# Altium PCB PCB.PcbDoc
Units mm, origin at the board's own origin, x right, y up, seen from the top; angles counter-clockwise.
Board outline 31.62 x 37.97 mm, 2 copper layers (Top Layer, Bottom Layer); 11 components, 10 nets, 30 pads, 1 vias.
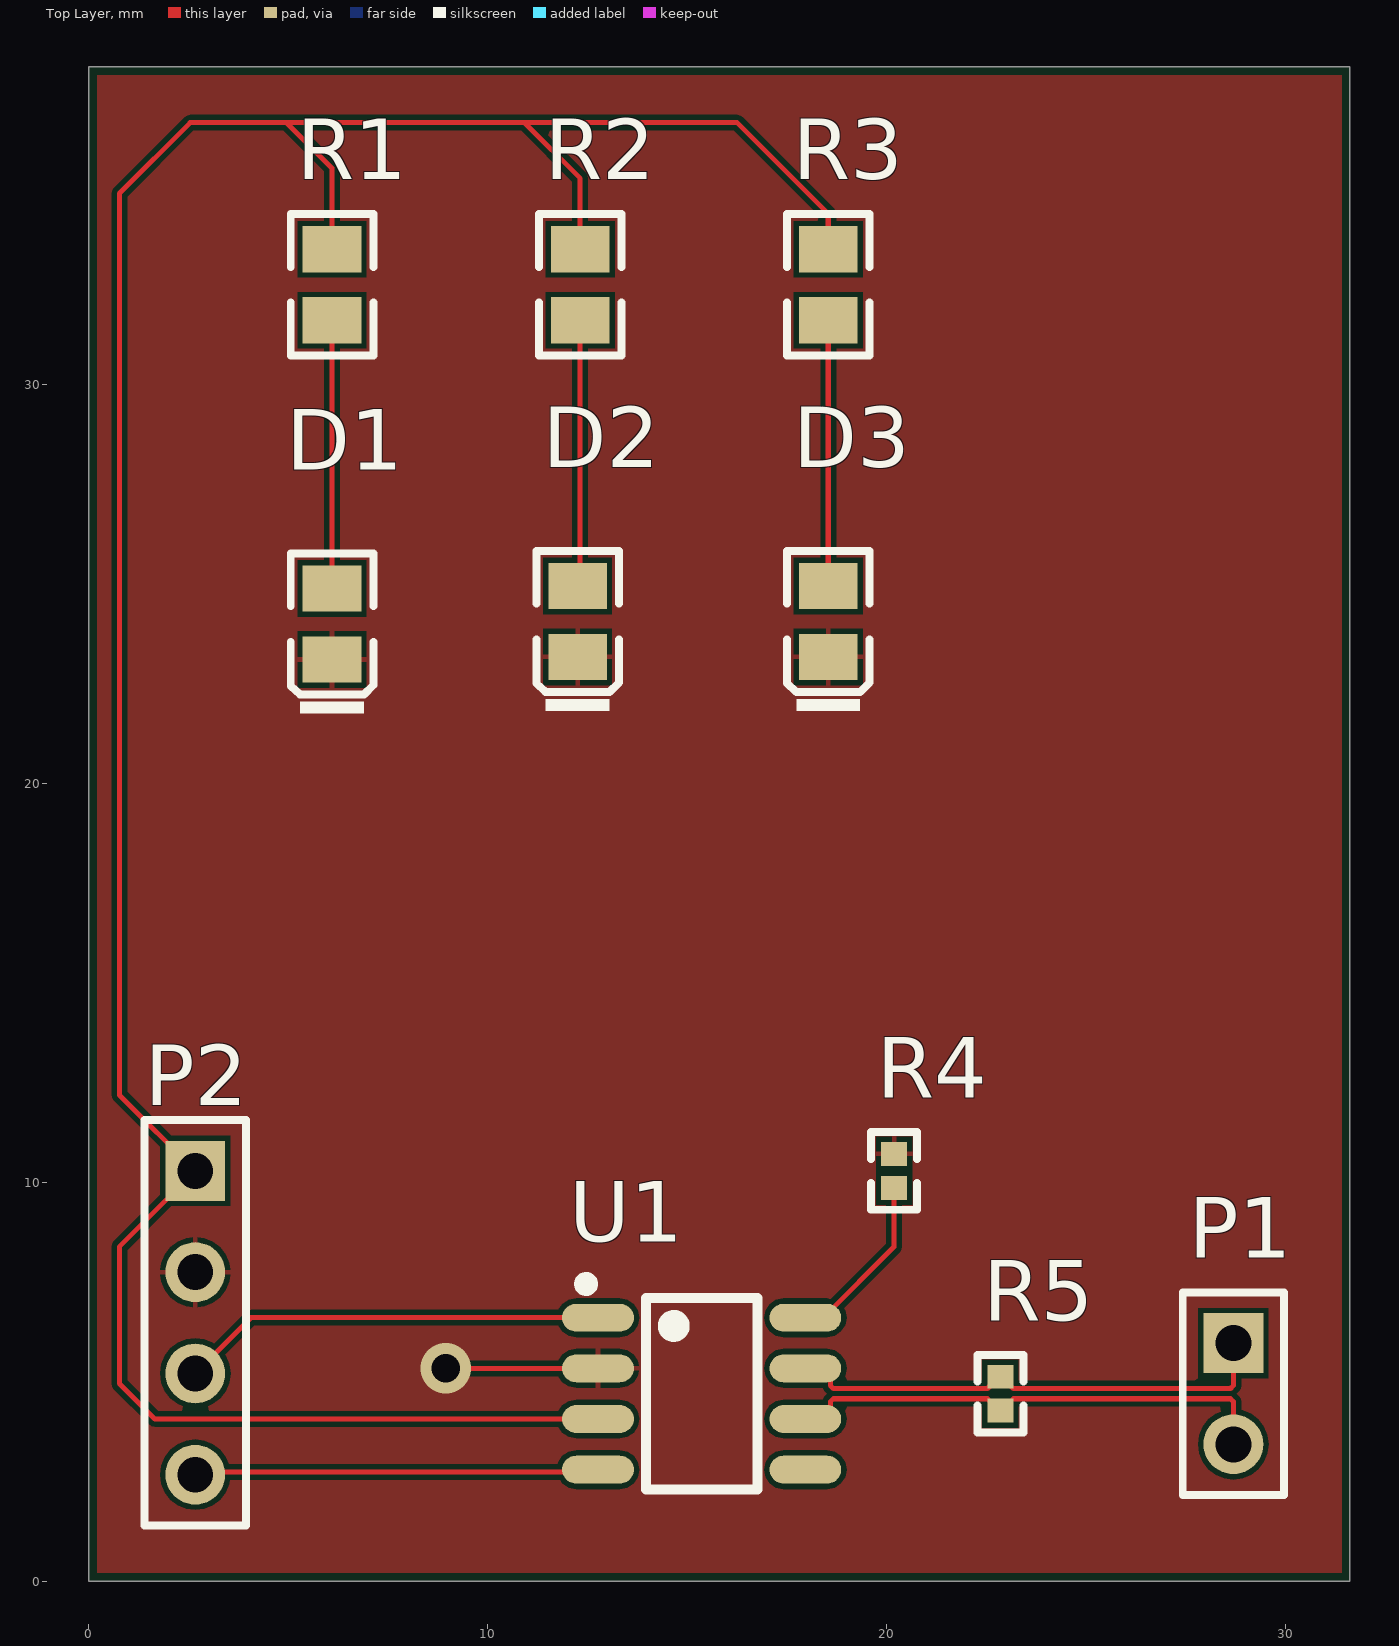
[diagram p0: Top Layer view]
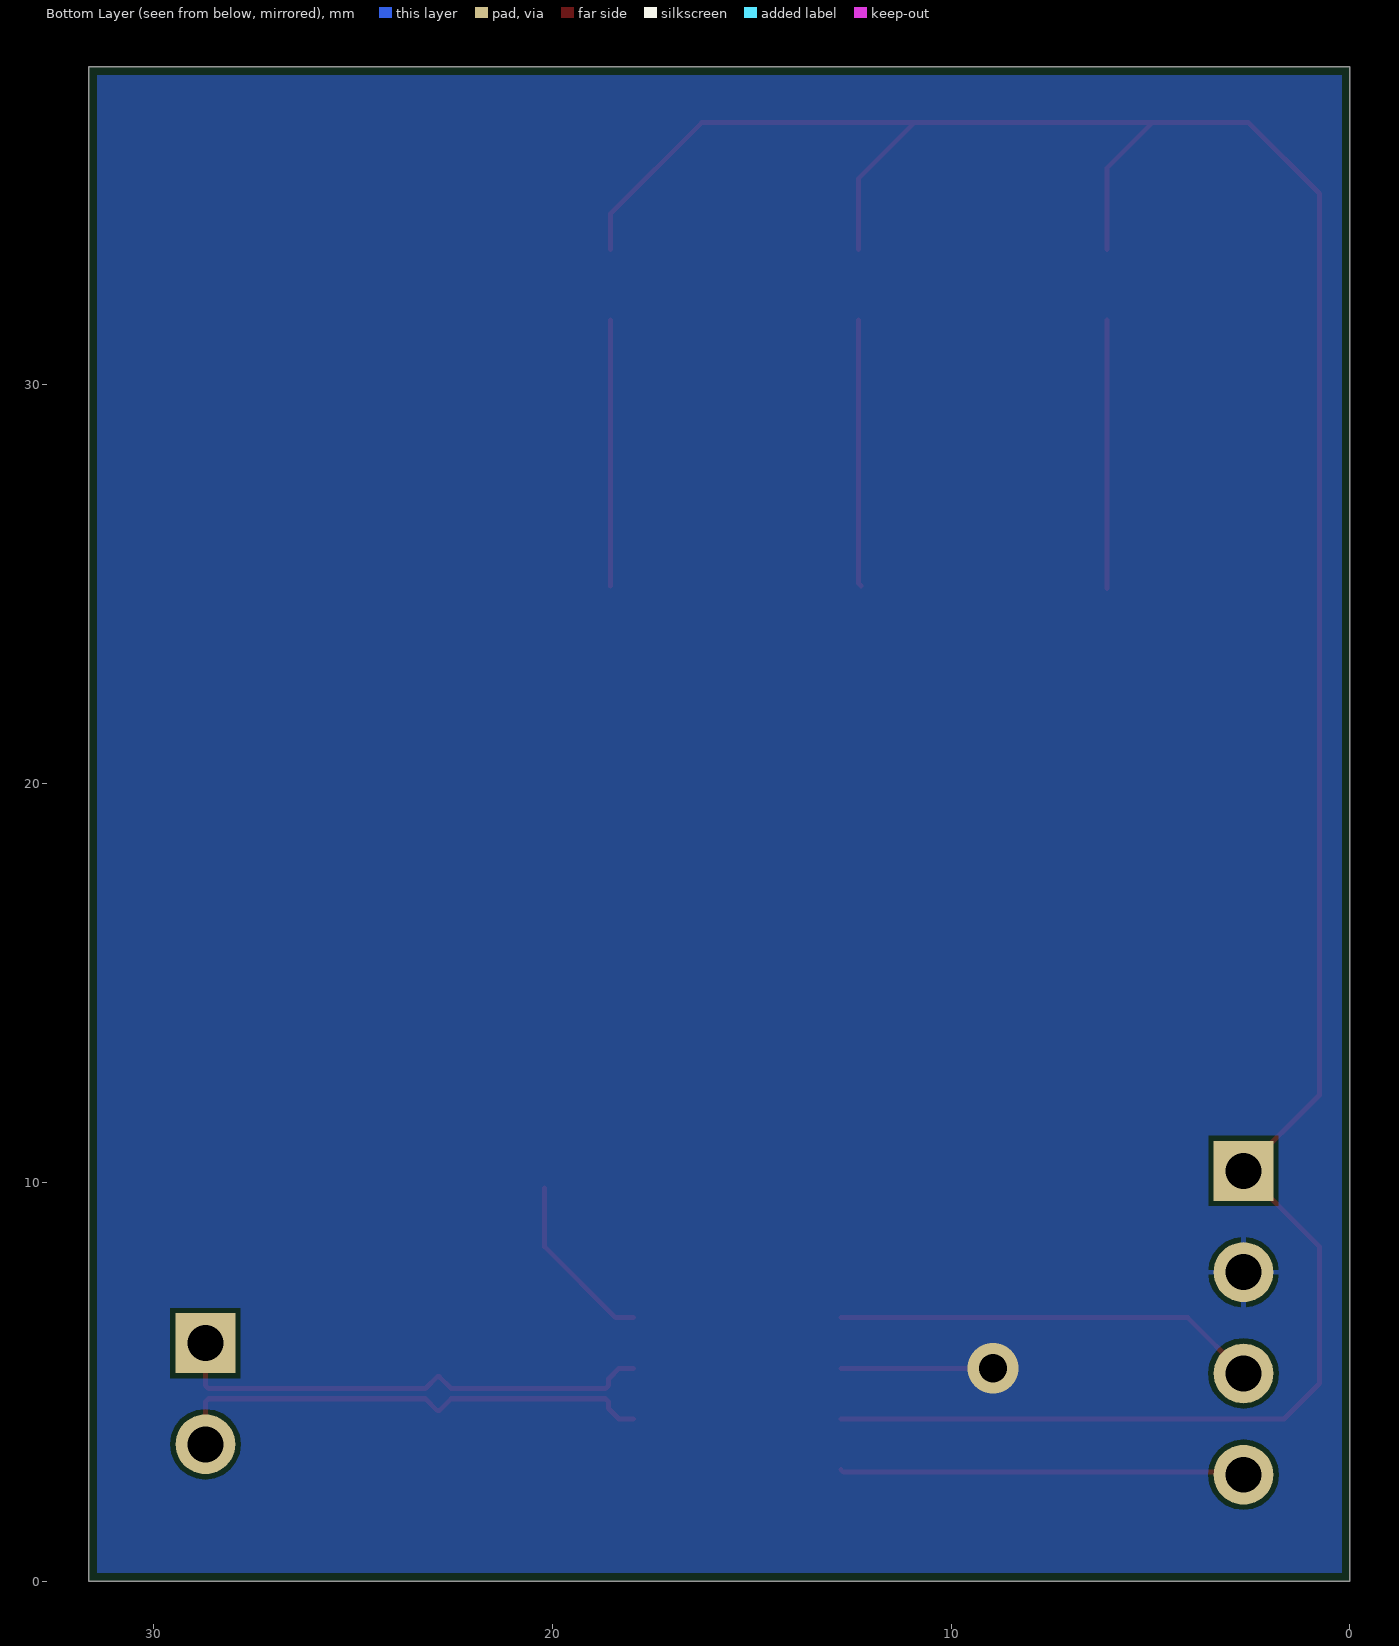
[diagram p1: Bottom Layer view, seen from below]
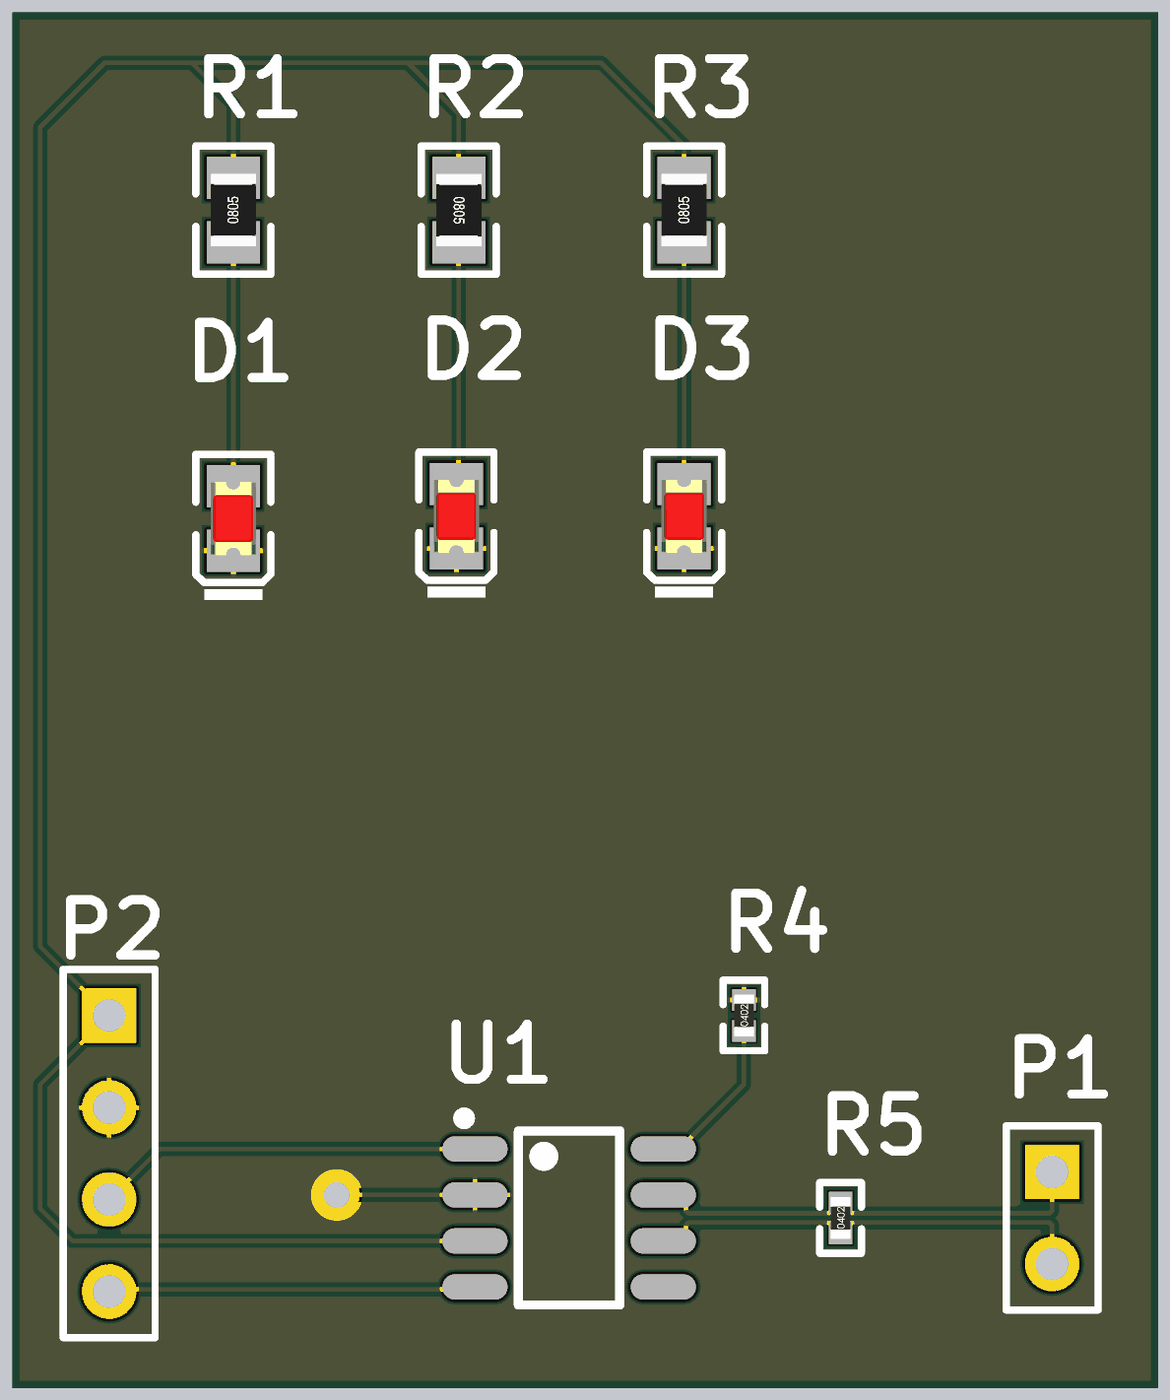
[diagram p2: 3D render of the assembled board from above, using the file's embedded part models]

## Layer stack, top to bottom
Top Solder: solder mask 0.0102, Solder Resist, Dk 3.5
Top Layer: signal copper 0.0356
Dielectric 1: dielectric 0.32, FR-4, Dk 4.8
Bottom Layer: signal copper 0.0356
Bottom Solder: solder mask 0.0102, Solder Resist, Dk 3.5

## Board outline
0,0 31.623,0 31.623,37.973 0,37.973

## Design rules (kind name [scope] priority, off if disabled: settings)
BoardOutlineClearance [All] p1: gap=0.2 ignorepadtopadclearanceinfootprint=FALSE
Clearance [All] p1: gap=0.127 ignorepadtopadclearanceinfootprint=FALSE except(0.25: Arc-Hole Track-Hole SMDPad-Hole THPad-Hole Via-Hole Fill-Hole Poly-Hole Region-Hole Text-Hole)
ComponentClearance [All] p1: gap=0.127 collisioncheckmode=3 verticalgap=0.127 showdistances=TRUE
DiffPairsRouting [All] p1: maxlimit=0.254 minlimit=0.127 mostfreqgap=0.127 toplayer_minwidth=0.127 toplayer_maxwidth=25.4 toplayer_prefwidth=0.127 bottomlayer_minwidth=0.127 bottomlayer_maxwidth=25.4 bottomlayer_prefwidth=0.127 maxuncoupledlength=12.7
Height [All] p1: minheight=0 maxheight=1816.048 prefheight=12.7
HoleSize [All] p1: absolutevalues=TRUE maxlimit=6.3 minlimit=0.3 maxpercent=80.000 minpercent=20.000
HoleToHoleClearance [All] p1: gap=0.25 allowstackedmicrovias=FALSE
MinimumAnnularRing [All] p1: minimumring=0.076
MinimumSolderMaskSliver [All] p1: minsoldermaskwidth=0
PlaneClearance [All] p1: clearance=0.127
PlaneConnect PlaneConnectPowerPads [InPadClass('PowerPads')] p1: planeconnectstyle=Direct reliefexpansion=0.508 reliefentries=4 reliefconductorwidth=0.254 reliefairgap=0.254
PlaneConnect [All] p2: pad.planeconnectstyle=Relief pad.reliefexpansion=0.3 pad.reliefentries=4 pad.reliefconductorwidth=0.127 pad.reliefairgap=0.127 via.planeconnectstyle=Direct via.reliefexpansion=0.3 via.reliefentries=4 via.reliefconductorwidth=0.127 via.reliefairgap=0.127
PolygonConnect PolygonConnectPowerPads [All vs (InPadClass('PowerPads'))] p1: connectstyle=Direct reliefconductorwidth=0.254 reliefentries=4 polygonreliefangle="90 Angle" airgapwidth=0.254
PolygonConnect [All] p2: thpad.connectstyle=Relief thpad.reliefconductorwidth=0.127 thpad.reliefentries=4 thpad.polygonreliefangle="90 Angle" thpad.airgapwidth=0.127 smdpad.connectstyle=Relief smdpad.reliefconductorwidth=0.127 smdpad.reliefentries=4 smdpad.polygonreliefangle="90 Angle" smdpad.airgapwidth=0.127 via.connectstyle=Direct via.reliefconductorwidth=0.127 via.reliefentries=4 via.polygonreliefangle="90 Angle" via.airgapwidth=0.127
RoutingVias [All] p1: holewidth=0.3 width=0.6 viastyle="Through Hole" minholewidth=0.3 minwidth=0.6 maxholewidth=0.6 maxwidth=6.6
SilkToSilkClearance [All] p1: silktosilkclearance=0
SilkToSolderMaskClearance [IsPad] p1: minsilkscreentomaskgap=0.127 clearancetoexposedcopper=TRUE
SolderMaskExpansion [All] p1: expansion=0.075 istentingtop=FALSE
Width [All] p1: maxlimit=25.4 minlimit=0.127 preferedwidth=0.127 minimp=50.000000 maximp=50.000000 favimp=50.000000
20 further rules are at their usual default settings.

## Classes and differential pairs
differential pair CAN: +CAN_P -CAN_N

## Components (designator, comment, footprint, x,y, rotation, side; value= is the part's Value field where it differs from the comment)
D1 "0805 Red" 0805_LED_S1 6.096,24.002 r90 top
D2 "0805 Red" 0805_LED_S1 12.255,24.066 r90 top
D3 "0805 Red" 0805_LED_S1 18.542,24.066 r90 top
P1 "Header 2" HDR1X2 28.702,5.969 r270 top
P2 "Header 4" HDR1X4 2.667,10.287 r270 top
R1 "1KΩ ±1%" 0805_R 6.096,32.512 r90 top
R2 "1KΩ ±1%" 0805_R 12.319,32.512 r270 top
R3 "1KΩ ±1%" 0805_R 18.542,32.512 r90 top
R4 "10KΩ ±1%" 0402_R 20.193,10.287 r90 top
R5 "120Ω ±1%" 0402_R 22.86,4.699 r90 top
U1 "CAN/SN65HVD230DR" SOIC-8_150mil 15.367,4.699 r270 top

## Footprints (in the part's own frame and the unit in brackets; to place one, negate y for a bottom-side part, rotate by r counter-clockwise, add the part's x,y. Pads: shape width x height; smd on the part's side, far side on the other; paste and mask are expansions set on the pad)
0402_R [mm]
  rect 0.6x0.65 smd mask+0.051: 1(-0.425,0) 2(0.425,0)
  silkscreen extent -0.97,-0.58 0.97,0.58, body extent -0.57,-0.27 0.58,0.28, height 0.41
0805_LED_S1 [mm]
  rect 1.16x1.47 smd: A(0.89,0) K(-0.89,0)
  silkscreen extent -2.24,-1.04 1.77,1.03, body extent -1.01,-0.63 1.01,0.62, height 1.1
0805_R [mm]
  rect 1.16x1.47 smd: 1(-0.89,0) 2(0.89,0)
  silkscreen extent -1.77,-1.04 1.77,1.03, body extent -1,-0.62 1,0.63, height 0.49
HDR1X2 [mm] "Connector; Header; 2 Position"
  rect 1.5x1.5 hole 0.9: 1(0,0)
  round 1.5 hole 0.9: 2(2.54,0)
  silkscreen extent -1.27,-1.27 3.81,1.27
HDR1X4 [mm] "Connector; Header; 4 Position"
  rect 1.5x1.5 hole 0.9: 1(0,0)
  round 1.5 hole 0.9: 2(2.54,0) 3(5.08,0) 4(7.62,0)
  silkscreen extent -1.27,-1.27 8.89,1.27
SOIC-8_150mil [mm]
  oval 0.7x1.8 smd: 1(-1.905,-2.6) 2(-0.635,-2.6) 3(0.635,-2.6) 4(1.905,-2.6) 5(1.905,2.6) 6(0.635,2.6) 7(-0.635,2.6) 8(-1.905,2.6)
  silkscreen extent -2.9,-3.05 2.4,1.4

## Part data
D1 D2 D3: library part "0805 LED Red", "LED", Color=Red, Manufacturer="Foshan NationStar Optoelectronics", Package=0805, PartNumber=FC-2012HRK-620D, SuppliersPartNumber=C84256, ComponentLink1Description=供应商链接, ComponentLink1URL=http://www.szlcsc.com/product/details_2668.html, Supplier=LC
P1: "Header, 2-Pin", LatestRevisionDate=17-Jul-2002, LatestRevisionNote="Re-released for DXP Platform.", Publisher="Altium Limited"
P2: "Header, 4-Pin", LatestRevisionDate=17-Jul-2002, LatestRevisionNote="Re-released for DXP Platform.", Publisher="Altium Limited"
R1 R2 R3: library part "0805 1K (1001) 1%", "Chip resistor", Manufacturer="Uniroyal Elec", Package=0805, PartNumber=0805W8F1001T5E, Power=1/8W, Resistance=1KΩ, SuppliersPartNumber=C17513, Tolerance=1%, ComponentLink1Description="Supplier link", ComponentLink1URL=http://www.szlcsc.com/product/details_18201.html, Supplier=LC
R4: library part "0402 10K (1002) 1%", "Chip resistor", Manufacturer="Uniroyal Elec", Package=0402, PartNumber=0402WGF1002TCE, Power=1/16W, Resistance=10KΩ, SuppliersPartNumber=C25744, Tolerance=1%, ComponentLink1Description="Supplier link", ComponentLink1URL=http://www.szlcsc.com/product/details_26487.html, Supplier=LC
R5: library part "0402 120R (1200) 1%", "Chip resistor", Manufacturer="Uniroyal Elec", Package=0402, PartNumber=0402WGF1200TCE, Power=1/16W, Resistance=120Ω, SuppliersPartNumber=C25079, Tolerance=1%, ComponentLink1Description="Supplier link", ComponentLink1URL=http://www.szlcsc.com/product/details_25822.html, Supplier=LC
U1: library part CAN/SN65HVD230DR_[C12084], "CAN", Package=SOIC-8_150mil, SuppliersPartNumber=C12084, ComponentLink1Description=供应商链接, ComponentLink1URL=http://www.szlcsc.com/product/details_12661.html, Supplier=LC

## Via types
v1: diameter 1.27, hole 0.711, Top Layer to Bottom Layer, 1 vias

## Nets (pads, with @x,y where several pads share a name; then routed paths per layer and width w, separated by ;. In a path a pad name is that pad's centre, name@x,y a point inside that pad or via, vN(x,y) a via of type N, cw(c..) or ccw(c..) an arc to the next point about the centre after c; other vN are vias at no path point)
CAN_N: P1.2 R5.1 U1.6 | length 12.4
  Top Layer w0.127: U1.6 18.329,4.064 18.594,4.329 18.594,4.498 18.668,4.572 22.034,4.572 22.537,4.572 22.835,4.274 R5.1 22.885,4.274 23.183,4.572 27.432,4.572 28.628,4.572 28.702,4.498 P1.2
CAN_P: P1.1 R5.2 U1.7 | length 12.4
  Top Layer w0.127: U1.7 18.329,5.334 18.594,5.069 18.594,4.9 18.668,4.826 21.929,4.826 22.537,4.826 22.835,5.124 R5.2 22.885,5.124 23.183,4.826 27.537,4.826 28.628,4.826 28.702,4.9 P1.1
GND: D1.K D2.K D3.K P2.2 R4.2 U1.2 | length 3.8
  Top Layer w0.127: v1(8.95,5.334) U1.2
NetD1_A: D1.A R1.1 | length 6.7
  Top Layer w0.127: D1.A R1.1
NetD2_A: D2.A R2.2 | length 6.7
  Top Layer w0.127: D2.A 12.319,25.02 R2.2
NetD3_A: D3.A R3.1 | length 6.7
  Top Layer w0.127: D3.A R3.1
NetR4_1: R4.1 U1.8 | length 4.4
  Top Layer w0.127: U1.8 18.415,6.604 20.193,8.382 R4.1
RX: P2.4 U1.4 | length 10.2
  Top Layer w0.127: P2.4 2.73,2.73 12.704,2.73 U1.4
TX: P2.3 U1.1 | length 10.7
  Top Layer w0.127: P2.3 4.064,6.604 U1.1
VCC3V3: P2.1 R1.2 R2.1 R3.2 U1.3 | length 71.5
  Top Layer w0.127: R1.2 6.096,35.433 4.953,36.576 ; R2.1 12.319,35.179 10.922,36.576 ; U1.3 1.651,4.064 0.762,4.953 0.762,8.382 P2.1 0.762,12.192 0.762,34.798 2.54,36.576 4.953,36.576 ; R3.2 18.542,34.29 16.256,36.576 10.922,36.576 ; 4.953,36.576 10.922,36.576
pads on no net: U1.5

## Polygon pours and split planes (outlines as drawn)
GND on Bottom Layer "GND_L02_P001" (solid, pour order 1): 0,0 0,37.973 31.623,37.973 31.623,0
GND on Top Layer "GND_L01_P000" (solid, pour order 0): 0,0 0,37.973 31.623,37.973 31.623,0